# Altium PCB MongooseMini.PcbDoc
Units mil, origin at the board's own origin, x right, y up, seen from the top; angles counter-clockwise.
Board outline 2500 x 1730 mil, 2 copper layers (Top Layer, Bottom Layer); 47 components, 45 nets, 176 pads, 324 vias.
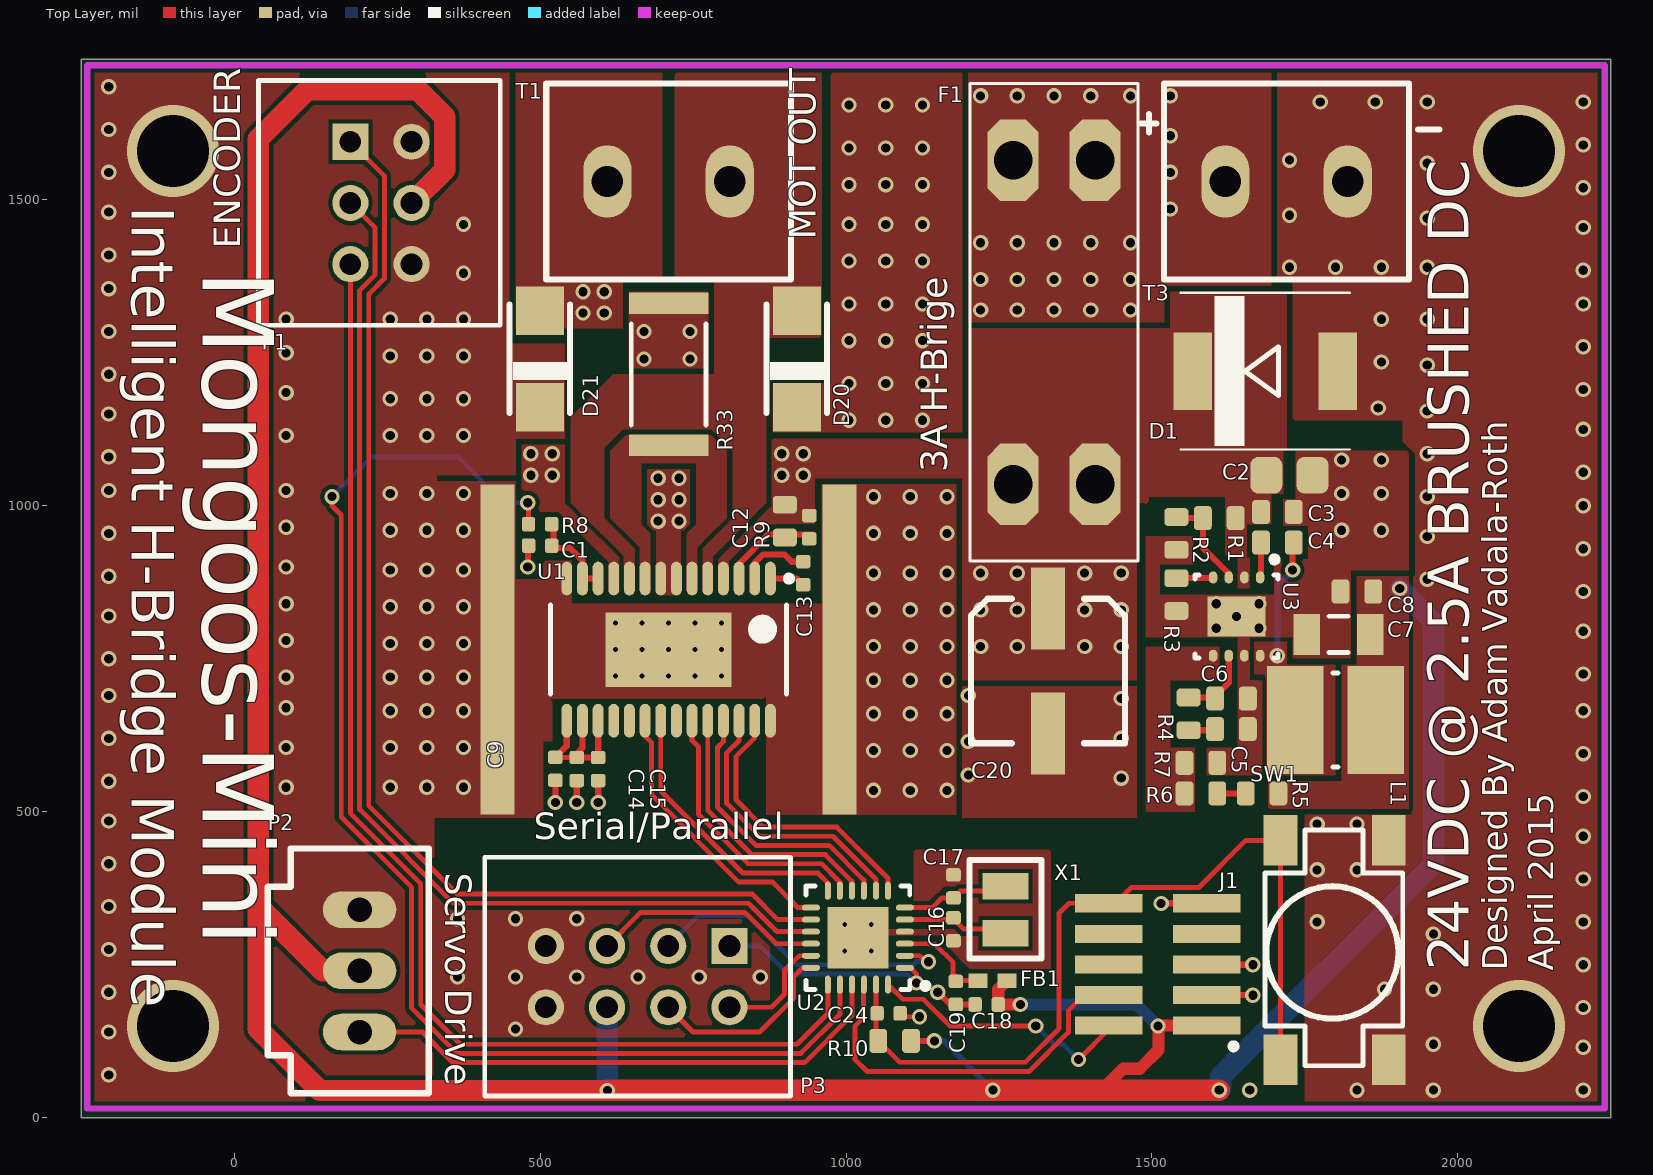
[diagram p0: Top Layer view]
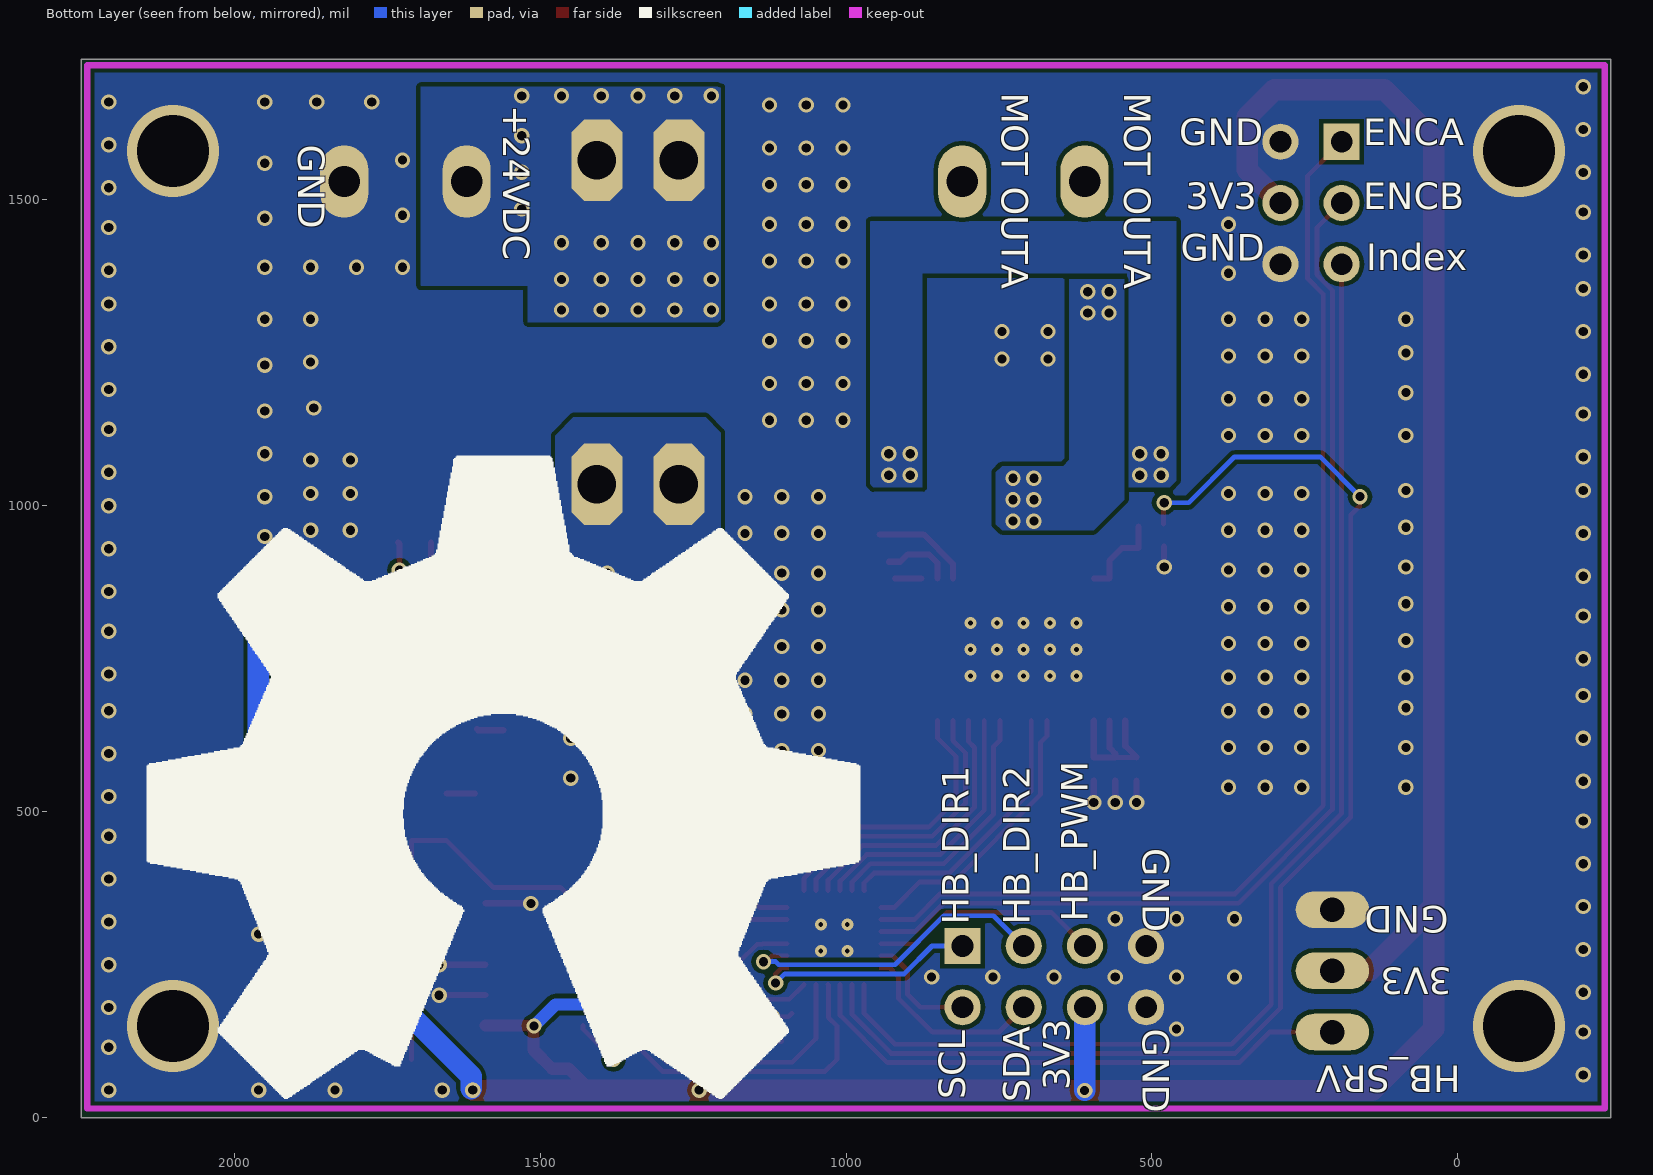
[diagram p1: Bottom Layer view, seen from below]

## Layer stack, top to bottom
Top Solder: solder mask 0.4, Solder Resist, Dk 3.5
Top Layer: signal copper 1.4
Dielectric 1: dielectric 12.6, FR-4, Dk 4.8
Bottom Layer: signal copper 1.4
Bottom Solder: solder mask 0.4, Solder Resist, Dk 3.5

## Board outline
-250,0 -250,1730 2250,1730 2250,0

## Design rules (kind name [scope] priority, off if disabled: settings)
Clearance [All] p1: gap=7
PlaneConnect [All] p1: planeconnectstyle=Direct reliefexpansion=20 reliefentries=4 reliefconductorwidth=10 reliefairgap=10
PolygonConnect [All] p1: connectstyle=Direct reliefconductorwidth=10 reliefentries=4 polygonreliefangle="90 Angle" airgapwidth=10
RoutingVias [All] p1: holewidth=28 width=50 viastyle="Through Hole" minholewidth=28 minwidth=50 maxholewidth=28 maxwidth=50
SolderMaskExpansion [All] p1: expansion=4
UnpouredPolygon [All] p1: allowunpoured=FALSE
Width [All] p1: maxlimit=100 minlimit=7 preferedwidth=8
28 further rules are at their usual default settings.

## Classes and differential pairs
component class Power: C2 C3 C4 C5 C6 C7 C8 C20 D1 F1 L1 R1 R2 R3 R4 R5 R6 R7 T3 U3
component class "MCU - MKL05VQFN24": C16 C17 C18 C19 C24 FB1 J1 P1 P2 P3 R10 SW1 U2 X1
component class "H-Bridge - DRV8829": C1 C9 C12 C13 C14 C15 D20 D21 R8 R9 R33 T1 U1

## Components (designator, comment, footprint, x,y, rotation, side; value= is the part's Value field where it differs from the comment)
C1 "0402" C0402 500,935 r0 top
C2 "0603" C0805 1725,1050 r180 top
C3 "0603" C0603 1705,990 r180 top
C4 "0603" C0603 1705,940 r180 top
C5 "0603" C0603 1630,635 r180 top
C6 "0603" C0603 1630,685 r180 top
C7 "10uF 50V" C1206 1805,790 r180 top
C8 "0603" C0603 1835,860 r0 top
C9 "0402" C0402 525,570 r90 top
C12 "100nF" C0603 900,975 r90 top
C13 "0402" C0402 930,890 r270 top
C14 "100nF" C0402 560,570 r270 top
C15 "100nF" C0402 595,570 r270 top
C16 "0402" C0402 1175.6,308.12 r270 top
C17 "0402" C0402 1175.6,378.12 r270 top
C18 "100nF" C0402 1230,185 r180 top
C19 "100nF" C0402 1179.47,204.16 r270 top
C20 "EEE-1VA101XP" EEE-1VA101XP 1330,730 r90 top
C24 "100nF" C0402 1069.47,170.53 r0 top
D1 "S3A-13-F" DO-214AB 1685,1220 r0 top
D20 "SMAJ30A" SMA-SM 920,1240 r90 top
D21 "SMAJ30A" SMA-SM 500,1240 r90 top
F1 "3557-2" 3557 1340,1300 r270 top
FB1 "BLM15HG601SN1D" BLM18PG121SN1D 1239.47,224.16 r180 top
J1 "FTSH-105-XX-X-DV" FTSH-105-XX-X-DV 1509.47,250.53 r270 top
L1 "LPS4018-224ML" LPS4018-224ML 1800,650 r0 top
P1 "Header 3X2" "HDR2X3 Shrouded - Molex 0901301106" 190,1595 r270 top
P2 "Molex 70543-03" 70543-03 205,240 r270 top
P3 "Header 4X2" "HDR2X4 Shrouded" 809.47,280.53 r180 top
R1 "174K" R0603 1610,980 r0 top
R2 "31.6K" R0603 1540,955 r90 top
R3 "301K" R0603 1540,855 r90 top
R4 "27.4k" R0603 1560,660 r90 top
R5 "51.1r" R0603 1680,530 r0 top
R6 "31.6K" R0603 1580,530 r0 top
R7 "10k" R0603 1580,580 r180 top
R8 "2.7K" R0402 500,970 r0 top
R9 "1M" R0402 940,965 r90 top
R10 "1K" R0603 1079.47,125.53 r0 top
R33 "2512" 2512R-0.55 710,1215 r270 top
SW1 "TL3301AF160QG" TL3301AF160QG 1710,95 r90 top
T1 "Pheonix Contact" CON-PHEONIX-508-Alt 810,1530 r180 top
T3 "Pheonix Contact" CON-PHEONIX-508-Alt 1820,1530 r180 top
U1 "DRV8829" TSSOP28-DRV8829 710,765 r270 top
U2 "MKL05Z16VFK4 - VQFN24" 98ASA00474D 1019.47,294.16 r180 top
U3 "TPS54062DRBT" QFN65P300X300X100_HS-17N 1638.39,818.98 r270 top
X1 "ABS07-32.768KHZ-T" ABS07-32.768KHZ-T 1260.6,378.12 r270 top

## Footprints (in the part's own frame and the unit in brackets; to place one, negate y for a bottom-side part, rotate by r counter-clockwise, add the part's x,y. Pads: shape width x height; smd on the part's side, far side on the other; paste and mask are expansions set on the pad)
98ASA00474D [mm] "QFN, 24-Leads, Body 3.98x3.98mm, Pitch 0.50mm, Thermal Pad 2.80x2.80mm, IPC Medium Density"
  oval 0.75x0.25 smd: 1(-1.95,1.25) 2(-1.95,0.75) 3(-1.95,0.25) 4(-1.95,-0.25) 5(-1.95,-0.75) 6(-1.95,-1.25) 13(1.95,-1.25) 14(1.95,-0.75) 15(1.95,-0.25) 16(1.95,0.25) 17(1.95,0.75) 18(1.95,1.25)
  oval 0.25x0.75 smd: 7(-1.25,-1.95) 8(-0.75,-1.95) 9(-0.25,-1.95) 10(0.25,-1.95) 11(0.75,-1.95) 12(1.25,-1.95) 19(1.25,1.95) 20(0.75,1.95) 21(0.25,1.95) 22(-0.25,1.95) 23(-0.75,1.95) 24(-1.25,1.95)
  rect 2.54x2.54 smd: 25(0,0)
  silkscreen extent -2.93,-2.15 2.15,2.15, body extent -2,-2 2,2, height 1
2512R-0.55 [mm] "2512 Resistor 6.35mm x 3.2mm x 0.55mm"
  rect 0.9x3.3 smd: 1(-2.95,0) 2(2.95,0)
  silkscreen extent -2.1,-1.55 2.1,1.55, body extent -3.22,-1.68 3.22,1.68, height 0.65
3557 [mil] "3557"
  oct 133x83 hole 63: 1(-265,-67) 1(-265,67) 2(265,-67) 2(265,67)
  silkscreen extent -390,-138 390,138, body extent -392,-140 392,140, height 709
70543-03 [mil]
  oval 60x120 hole 40: 1(-100,0) 2(0,0) 3(100,0)
  silkscreen extent -200,-150 200,113, body extent -200,-150 200,113, height 450
ABS07-32.768KHZ-T [mm] "ABS07-32.768KHZ-T Crystal Oscillator"
  rect 1.1x1.9 smd: 1(0,0) 2(1.95,0)
  silkscreen extent -1.1,-1.5 3,1.5
BLM18PG121SN1D [mm] "Chip Inductor, 2-Leads, Body 1.0x0.5mm, IPC Medium Density"
  rect 0.8x0.6 smd: 1(-0.6,0) 2(0.6,0)
  body extent -0.52,-0.28 0.53,0.27, height 0.6
C0402 [mil]
  rrect40% 22x24 smd: 1(-18.7,0) 2(19,0)
  body extent -20,-10 20,10, height 20
C0603 [mm]
  rrect40% 0.74x1 smd: 1(-0.68,0) 2(0.68,0)
  body extent -0.8,-0.4 0.8,0.4, height 0.8
C0805 [mil]
  rrect50% 52x60 smd: 1(-37.4,0) 2(38,0)
  body extent -40,-30 40,30, height 35
C1206 [mm]
  rect 1.1x1.7 smd: 1(-1.325,0) 2(1.325,0)
  silkscreen extent -0.4,-0.75 0.4,0.75, body extent -1.68,-0.87 1.67,0.88, height 1.6
CON-PHEONIX-508-Alt [mm]
  oval 2x3 hole 1.3: 1(0,0) 2(5.08,0)
  silkscreen extent -2.54,-4.06 7.62,4.06
DO-214AB [mil]
  rect 63x126 smd: A(119,0) C(-118.11,0)
  silkscreen extent -138,-128 138,128, body extent -140,-130 140,130, height 98
EEE-1VA101XP [mm] "Panasonic VS D EEE-1VA101XP"
  rect 3.4x1.4 smd: 1(2.6,0) 2(-2.6,0)
  silkscreen extent -3,-3.2 3,3.2, body extent -3.5,-3.3 3.5,3.3, height 5.4
FTSH-105-XX-X-DV [mm] "1.27mm pitch, 10 pin, terminal strip; vertical, SMT"
  rect 0.75x2.8 smd mask+0: 1(2.54,2.03) 2(2.54,-2.03) 3(1.27,2.03) 4(1.27,-2.03) 5(0,2.03) 6(0,-2.03) 7(-1.27,2.03) 8(-1.27,-2.03) 9(-2.54,2.03) 10(-2.54,-2.03)
  silkscreen extent 3.28,3.03 3.52,3.27
"HDR2X3 Shrouded - Molex 0901301106" [mm] "Connector; Header; 3x2 Position Molex 0901301106"
  rect 1.5x1.5 hole 0.9: 1(0,0)
  round 1.5 hole 0.9: 2(0,2.54) 3(2.54,0) 4(2.54,2.54) 5(5.08,0) 6(5.08,2.54)
  silkscreen extent -2.54,-3.81 7.62,6.22, body extent -2.44,-3.65 7.52,6.1, height 8.35
"HDR2X4 Shrouded" [mm] "Connector; Header; 4x2 Position"
  rect 1.5x1.5 hole 0.9: 1(0,0)
  round 1.5 hole 0.9: 2(0,2.54) 3(2.54,0) 4(2.54,2.54) 5(5.08,0) 6(5.08,2.54) 7(7.62,0) 8(7.62,2.54)
  silkscreen extent -2.54,-3.68 10.16,6.22, body extent -2.44,-3.6 10.06,6.15, height 10.06
LPS4018-224ML [mm] "Precision Wire Wound Inductor, 2-Leads, Body 4.40x3.90mm, IPC Medium Density"
  rect 2.35x4.5 smd: 1(-1.675,0) 2(1.675,0)
  silkscreen extent -0.1,-1.95 0.1,1.95, body extent -2.2,-1.95 2.2,1.95, height 1.7
QFN65P300X300X100_HS-17N [mm] "QFN, 16-Leads, Body 3.00x3.00mm, Pitch 0.65mm, Thermal Pad 1.65x2.40mm, IPC Medium Density"
  oval 0.5x0.35 smd: 1(-1.625,0.975) 2(-1.625,0.325) 3(-1.625,-0.325) 4(-1.625,-0.975) 5(1.625,-0.975) 6(1.625,-0.325) 7(1.625,0.325) 8(1.625,0.975)
  rect 1.65x2.4 smd: 9(0,0)
  silkscreen extent -2.5,-1.73 1.73,1.73, body extent -1.58,-1.58 1.58,1.58, height 1
R0402 [mil]
  rrect40% 22x24 smd: 1(-18.9,0) 2(19,0)
  body extent -20,-10 20,10, height 14
R0603 [mm]
  rrect40% 0.74x1 smd: 1(-0.68,0) 2(0.68,0)
  body extent -0.8,-0.4 0.8,0.4, height 0.8
SMA-SM [mil]
  rect 79x79 smd: A(79,0) C(-78.74,0)
  silkscreen extent -89,-49 89,50, body extent -105,-54 105,55, height 116
TL3301AF160QG [mm] "TL3301AF160QG Tactile Switch"
  rect 2.1x1.4 smd: 1(0,0) 1(9.1,0) 2(0,-4.5) 2(9.1,-4.5)
  silkscreen extent -0.25,-5.08 9.53,0.64, body extent -0.43,-5.26 9.57,0.74, height 5.11
TSSOP28-DRV8829 [mm] "TSOP, 28-Leads, Body 9.70x4.40mm, Pitch 0.65mm, Thermal Pad 5.22x3.10mm, IPC Medium Density"
  oval 1.4x0.45 smd: 1(-2.95,4.225) 2(-2.95,3.575) 3(-2.95,2.925) 4(-2.95,2.275) 5(-2.95,1.625) 6(-2.95,0.975) 7(-2.95,0.325) 8(-2.95,-0.325) 9(-2.95,-0.975) 10(-2.95,-1.625) 11(-2.95,-2.275) 12(-2.95,-2.925) 13(-2.95,-3.575) 14(-2.95,-4.225) 15(2.95,-4.225) 16(2.95,-3.575) 17(2.95,-2.925) 18(2.95,-2.275) 19(2.95,-1.625) 20(2.95,-0.975) 21(2.95,-0.325) 22(2.95,0.325) 23(2.95,0.975) 24(2.95,1.625) 25(2.95,2.275) 26(2.95,2.925) 27(2.95,3.575) 28(2.95,4.225)
  rect 3.1x5.22 smd: 29(0,0)
  silkscreen extent -3.07,-4.9 1.85,5.13, body extent -2.25,-4.9 2.25,4.9, height 1.2

## Part data
C1: library part "100nF C0402 - GRM155R71C104KA88D", "Capacitor (Semiconductor SIM Model)"
C2: library part CL21A225KB9LNNC, "CAP CER 2.2UF 50V 10% X5R 0805"
C3 C8: library part CL10B104KB8SFNC, "CAP CER 0.1UF 50V 10% X7R 0603"
C4: library part CL10B103KB8NCNC, "CAP CER 10000PF 50V 10% X7R 0603"
C5: library part CL10B223JB8NNNC, "CAP CER 0.022UF 50V 5% X7R 0603"
C6: library part CL10C270JB8NNNC, "CAP CER 27PF 50V 5% NP0 0603"
C7: library part CL31A106KBHNNNE, "CAP CER 10UF 50V 10% X5R 1206"
C9: library part GRM155R60J474KE19D, "0.47uF 6.3v C0402 - GRM155R60J474KE19D"
C12: library part C0603C104K5RACTU, "CAP CER 0603 100nF 50V 10% X7R"
C13: library part GRM155R71H103JA88D, "CAP CER 10000PF 50V X7R 0402"
C14 C15 C18 C19 C24: library part GRM155R71C104KA88D, "CAP CER 0402 100nF 16V 10% X7R"
C16 C17: library part CL05C180GB5NNNC, "CAP CER 18PF 50V 2% NP0 0402"
C20: "CAP ALUM 100UF 35V 20% SMD"
D1: "DIODE DO-214AB"
D20 D21: "DIODE TVS 30V SMA"
F1: "FUSE PTH ATO"
J1: library part "ARM Cortex JTAG-DEBUG Header"
L1: "Inductor"
P1: "Header, 3-Pin, Dual row"
P2: library part "Molex Endstop"
P3: "Header, 4-Pin, Dual row"
R1: library part RC1608F1743CS, "RES SMD 174K OHM 1% 1/10W 0603"
R2 R6: library part RC1608F3162CS, "RES SMD 31.6K OHM 1% 1/10W 0603"
R3: library part RC1608F3013CS, "RES SMD 301K OHM 1% 1/10W 0603"
R4: library part RC1608F2742CS, "RES SMD 27.4K OHM 1% 1/10W 0603"
R5: library part RC1608F51R1CS, "RES SMD 51.1 OHM 1% 1/10W 0603"
R7: library part RC1608J103CS, "RES SMD 10K OHM 5% 1/10W 0603"
R8: library part ERJ-2RKF2701X, "RES SMD 2.7K OHM 1% 1/10W 0402"
R9: library part ERJ2GEJ105X, "RES 0402 1M 100mW 5%"
R10: library part ERJ-3EKF1001V, "RES 0603 1K 100mW 1%"
R33: library part CSRN2512FTR100, "RES SMD 0.1 OHM 1% 2W 2512"
T1 T3: library part "Pheonix Contact 2X1"
U1: "IC MOTOR DRIVER PAR 28HTSSOP"
U2: library part "MKL05Z16VFK4 - 24 Pin VQFN", "ARM Cortex M0+"
U3: "IC REG BUCK SYNC ADJ 50MA DRBT"
X1: "ABS07-32.768KHZ-T RTC Crystal Oscillator"

## Free pads (board coordinates)
  rect 55.12x539.37 smd: 1(430.47,765) 1(989.53,765)

## Via types
v1: diameter 25, hole 15, Top Layer to Bottom Layer, 301 vias
v2: diameter 19.68, hole 7.87, Top Layer to Bottom Layer, 19 vias
v3: diameter 150, hole 118.11, Top Layer to Bottom Layer, 4 vias

## Nets (pads, with @x,y where several pads share a name; then routed paths per layer and width w, separated by ;. In a path a pad name is that pad's centre, name@x,y a point inside that pad or via, vN(x,y) a via of type N, cw(c..) or ccw(c..) an arc to the next point about the centre after c; other vN are vias at no path point)
3.3VCC: C7.1 C8.2 C18.1 FB1.1 J1.1 L1.2 P1.4 P2.2 P3.6 R5.2 R10.2 | length 5645.3
  Top Layer w10: R10.2@1106.25,125.53 v1(1144.47,125.53)
  Top Layer w20: FB1.1 1248.7,209.77 C18.1 v1(1285,185) ; 1416.47,43.53 1452.95,80 1480,80 1510.53,110.53 1510.53,150.53 J1.1
  Top Layer w35: 40,345.5 39.5,345 39.5,145 140,44.5 v1(610,44.5) 610.5,45 v1(1240,45) v1(1610,45) ; P2.2 145,240 39.5,345.5 39.5,1599.5 120,1680 300,1680 344.03,1635.97 344.03,1549.03 P1.4
  Bottom Layer w10: v1(1144.47,125.53) 1159.47,125.53 v1(1240,45)
  Bottom Layer w20: v1(1285,185) 1475,185 v1(1510,150)
  Bottom Layer w35: P3.6 609.47,45.03 v1(610,44.5) ; v1@1612.5,47.5 1612.5,67.5 1960.5,415.5 1960.5,809.5 v1(1905,865)
24VCC: C2.2 C3.2 C12.2 C20.1 D1.C F1.2 R1.2 R9.2 U1.4 U1.11 U3.2
  other v1: 1220,770 1280,770 1390,770 1450,770 1220,830 1280,830 1390,830 1450,830 1220,890 1280,890 1390,890 1450,890 485,1050 520,1050 895,1050 930,1050 485,1085 520,1085 895,1085 930,1085
ENC_A: P1.1 U2.14 | length 1918.4
  Top Layer w8: P1.1 245.53,1539.47 245.53,1371.47 220,1345.95 220,510 364.47,365.53 846.9,365.53 888.74,323.69 U2.14
ENC_B: P1.3 U2.15 | length 1839
  Top Layer w8: P1.3 230.53,1454.47 230.53,1377.69 205,1352.16 205,503.79 358.26,350.53 840.69,350.53 887.21,304 U2.15
ENC_INDEX: P1.5 U2.19 | length 2017.8
  Top Layer w8: P1.5 190,497.57 305,382.57 305,185 370,120 920,120 970.26,170.26 U2.19
GND: C1.1 C2.1 C3.1 C5.1 C6.1 C7.2 C8.1 C9.1 C14.2 C15.2 C16.2 C17.1 C18.2 C19.2 C20.2 C24.2 D1.A D20.C D21.C J1.3 J1.5 J1.9 P1.2 P1.6 P2.1 P3.7 P3.8 pad.1 R2.1 R3.1 R7.1 R33.1 SW1.2 T3.1 U1.14 U1.28 U1.29 U2.4 U2.25 U3.7 U3.9 | length 471.1
  Top Layer w8: C24.2 1094,165 v1(1120,165)
  Top Layer w10: v1(480,900) C1.1@480,933.7 ; v1(525,515) C9.1@525,551 ; v1(560,515) C14.2 ; v1(595,515) C15.2 ; v1(1150,205) 1170,185 C18.2 ; v1(1515,350) 1515.53,350.53 J1.9 ; J1.3 1664.47,200.53 v1(1665,200) ; J1.5 1589.92,250 v1(1665,250)
  other v1: 1660,45 1835,45 1960,45 2205,45 -205,70 2205,115 1960,120 -205,140 460,145 2205,180 -205,205 1880,210 1960,210 365,230 460,230 560,230 660,230 760,230 860,230 2205,250 -205,275 1960,300 1770,320 2205,320 365,325 460,325 560,325 -205,345 2205,390 1770,405 1835,405 -205,415 2205,460 1770,480 1835,480 -205,485 2205,525 1045,535 1105,535 1165,535 85,540 255,540 315,540 375,540 -205,550 1450,555 1200,560 2205,595 1045,600 1105,600 1165,600 85,605 255,605 315,605 375,605 1200,615 -205,620 1450,620 1045,660 1105,660 1165,660 255,665 315,665 375,665 2205,665 85,670 1450,685 -205,690 1200,690 1045,715 1105,715 1165,715 85,720 255,720 315,720 375,720 2205,725 -205,750 1045,770 1105,770 1165,770 255,775 315,775 375,775 85,780 2205,795 1605,800 1675,800 1638.39,818.98 -205,820 1045,830 1105,830 1165,830 255,835 315,835 375,835 85,840 1605,840 1675,840 2205,860 1950,880 -205,885 1045,890 1105,890 1165,890 255,895 315,895 375,895 85,900 2205,930 1950,950 -205,955 1045,955 1105,955 1165,955 255,960 315,960 375,960 1810,960 1875,960 85,965 2205,1000 1045,1015 1105,1015 1165,1015 1950,1015 255,1020 315,1020 375,1020 1810,1020 1875,1020 -205,1025 85,1025 85,1025 2205,1055 1810,1075 1875,1075 -205,1080 1950,1085 85,1115 255,1115 315,1115 375,1115 2205,1125 1005,1140 1065,1140 1125,1140 -205,1150 1950,1155 1870,1160 255,1175 315,1175 375,1175 85,1185 2205,1190 1005,1200 1065,1200 1125,1200 -205,1215 1950,1230 1875,1235 670,1240 745,1240 255,1245 315,1245 375,1245 85,1250 2205,1260 1005,1270 1065,1270 1125,1270 -205,1285 670,1285 745,1285 85,1305 255,1305 315,1305 375,1305 1875,1305 1950,1305 1005,1330 1065,1330 1125,1330 2205,1330 -205,1355 375,1380 2205,1385 1725,1390 1800,1390 1875,1390 1950,1390 1005,1400 1065,1400 1125,1400 -205,1410 2205,1455 375,1460 1005,1460 1065,1460 1125,1460 1950,1470 1725,1475 -205,1480 2205,1520 1005,1525 1065,1525 1125,1525 -205,1545 1950,1560 1725,1565 1005,1585 1065,1585 1125,1585 2205,1590 -205,1615 1005,1655 1065,1655 1125,1655 1775,1660 1865,1660 1950,1660 2205,1660 -205,1685
  other v2: 997.82,272.51 1041.13,272.51 997.82,315.81 1041.13,315.81 623.39,721.69 666.69,721.69 710,721.69 753.31,721.69 796.61,721.69 623.39,765 666.69,765 710,765 753.31,765 796.61,765 623.39,808.31 666.69,808.31 710,808.31 753.31,808.31 796.61,808.31
  other v3: -100,150 2100,150 -100,1580 2100,1580
HB_DIR1: P3.1 U2.1 | length 368.5
  Top Layer w8: U2.1 1105.05,244.95 1115,235 v1(1115,220)
  Bottom Layer w8: P3.1 859.47,280.53 905,235 1100,235 v1(1115,220)
HB_DIR2: P3.3 U2.2 | length 524
  Top Layer w8: U2.2 1120.37,264.63 1130,255 v1(1135,255)
  Bottom Layer w8: P3.3 758.94,330 840,330 920,250 1110,250 1115,255 v1(1135,255)
HB_PWM: P3.5 U2.16 | length 377.2
  Top Layer w8: P3.5 664.47,335.53 834.47,335.53 885.68,284.32 U2.16
HB_SRV: P2.3 U2.21 | length 911.4
  Top Layer w8: P2.3@205,130.53 214.47,140 307.57,140 357.57,90 932.43,90 1009.63,167.2 U2.21
I2C_SCL: P3.2 U2.17 | length 190.8
  Top Layer w8: P3.2 878.26,180.53 899.47,201.74 899.47,240.53 923.58,264.63 U2.17
I2C_SDA: P3.4 U2.18 | length 314
  Top Layer w8: P3.4 750,140 858.95,140 914.47,195.53 914.47,230.53 928.89,244.95 U2.18
NetC1_2: C1.2 R8.2 U1.12 U1.13 | length 145.8
  Top Layer w10: R8.2@522,966 522,931 549,931 569.25,910.75 U1.13 U1.12
NetC4_1: C4.1 L1.1 U3.8 | length 196.1
  Top Layer w10: v1(1730,895) 1730,938.23 C4.1
  Bottom Layer w10: v1(1705,755) 1705,870 v1(1730,895)
NetC4_2: C4.2 U3.1 | length 57.7
  Top Layer w10: U3.1 1678.23,884.41 C4.2
NetC5_2: C5.2 R4.1 | length 44
  Top Layer w10: R4.1 1601.46,633.23 C5.2
NetC6_2: C6.2 R4.2 U3.6 | length 119.7
  Top Layer w10: R4.2 1601.45,686.78 1625.59,710.91 U3.6
NetC9_2: C9.2 C14.1 C15.1 U1.15 U1.16 U1.17 | length 261.9
  Top Layer w8: C9.2 559.7,589 C14.1
  Top Layer w10: C9.2 543.66,607.66 U1.15 ; U1.16 569.25,604.25 560,595 C14.1 C15.1 595,648.7 U1.17
NetC12_1: C12.1 R9.1 U1.3 | length 163.8
  Top Layer w10: U1.3 825.16,905.16 873.23,953.23 R9.1@945,953.23
NetC13_1: C13.1 U1.2 | length 115.6
  Top Layer w10: U1.2 850.75,906.71 864.74,920.7 899.3,920.7 911.3,908.7 C13.1
NetC13_2: C13.2 U1.1 | length 43.5
  Top Layer w10: U1.1 C13.2@919.86,881.14
NetC16_1: C16.1 U2.5 X1.2 | length 144.2
  Top Layer w8: U2.5 1172.47,323.69 C16.1 ; C16.1@1178.05,322.65 1192.58,308.12 X1.2@1235.6,308.12
NetC17_2: C17.2 U2.6 X1.1 | length 178.7
  Top Layer w8: U2.6 1140.85,343.37 1156.6,359.12 C17.2 1186.81,370.33 X1.1@1252.81,370.33 ; X1.1@1236.69,371.38 X1.1@1244.47,379.16
NetC19_1: C19.1 FB1.2 U2.3 | length 155.5
  Top Layer w8: U2.3 1135.68,284.32 1136.5,283.5 1145.24,283.5 1175,253.74 1175,235 1185.84,224.16 FB1.2
NetD20_A: D20.A T1.1 U1.5 U1.10
NetD21_A: D21.A T1.2 U1.7 U1.8
  other v1: 693,975 727,975 693,1010 727,1010 693,1045 727,1045 570,1315 605,1315 570,1350 605,1350
NetF1_1: F1.1 T3.2
  other v1: 1220,1320 1280,1320 1340,1320 1400,1320 1465,1320 1220,1370 1280,1370 1340,1370 1400,1370 1465,1370 1220,1430 1280,1430 1340,1430 1400,1430 1465,1430 1530,1485 1530,1545 1530,1605 1220,1670 1280,1670 1340,1670 1400,1670 1465,1670 1530,1670
NetR1_1: R1.1 R2.2 U3.3 | length 158.6
  Top Layer w10: R2.2 1541.77,980 R1.1 1583.23,931.77 1625.59,889.41 U3.3
NetR3_2: R3.2 U3.4 | length 60.5
  Top Layer w10: R3.2 1598.82,881.78 U3.4
NetR5_1: R5.1 R6.2 | length 46.5
  Top Layer w10: R6.2 R5.1
NetR6_1: R6.1 R7.2 U3.5
NetR8_1: R8.1 U2.20 | length 2109.1
  Top Layer w8: v1(160,1015) 160,1000 175,985 175,491.36 290,376.36 290,178.79 363.79,105 926.21,105 989.95,168.73 U2.20 ; v1(480,1005) 481.1,1003.9 R8.1
  Bottom Layer w8: v1(160,1015) 225,1080 365,1080 440,1005 v1(480,1005)
NetR33_2: R33.2 U1.6 U1.9
NetU1_20: U1.20 U2.13 | length 462.3
  Top Layer w8: U1.20 671.61,623.39 682.21,612.8 682.21,527.8 825,385 880,385 921.63,343.37 U2.13
NetU1_21: U1.21 U2.12 | length 464
  Top Layer w8: U1.21 697.21,534.01 831.21,400 953.93,400 970.26,383.67 U2.12 U2.12@969.47,371.72
NetU1_23: U1.23 U2.11 | length 448.3
  Top Layer w8: U1.23 748.39,616.61 758.98,606.02 758.98,496.17 840.15,415 960.15,415 989.95,385.2 U2.11
NetU1_24: U1.24 U2.10 | length 445.8
  Top Layer w8: U1.24 773.98,502.38 846.36,430 966.36,430 1009.63,386.73 U2.10
NetU1_25: U1.25 U2.9 | length 451.3
  Top Layer w8: U1.25 799.57,614.57 790,605 790,507.57 852.57,445 972.57,445 1029.32,388.26 U2.9
NetU1_26: U1.26 U2.8 | length 457.6
  Top Layer w8: U1.26 825.16,616.37 805,596.21 805,513.79 858.79,460 978.79,460 1049,389.79 U2.8
NetU1_27: U1.27 U2.7 | length 464
  Top Layer w8: U1.27 850.75,620.75 820,590 820,520 865,475 985,475 1068.69,391.32 U2.7
RESET: C24.1 J1.10 R10.1 SW1.1 U2.23 | length 1374.1
  Top Layer w8: U2.23 1049,129.24 R10.1 1087.71,90.53 1293.26,90.53 1348.43,145.7 1348.43,334.49 1364.47,350.53 J1.10 ; J1.10@1440,350 1466.29,376.29 1576.3,376.29 1653.28,453.27 1710,453.27 SW1.1@1710,95
TCK/SWDCLK: J1.4 U2.22 | length 623.2
  Top Layer w8: U2.22 1028.77,216.85 1028.77,163.77 1015,150 1015,95 1034.47,75.53 1299.47,75.53 1363.43,139.49 1363.43,174.49 1389.47,200.53 J1.4
TDI: J1.8
TDO/SWO: J1.6
TMS/SWDIO: J1.2 U2.24 | length 438.1
  Top Layer w8: U2.24 1092.55,193.53 1126.47,193.53 1170,150 v1(1310,150) ; v1(1380,95) 1429.55,144.55 J1.2
  Bottom Layer w8: v1(1310,150) 1340,120 1355,120 v1(1380,95)
pads on no net: J1.7 U1.18 U1.19 U1.22

## Polygon pours and split planes (outlines as drawn)
GND on Top Layer "Bottom Layer-No Net" (solid, remove dead copper, pour order 67): 335,1720 -240,1720 -240,15 180,15 325,15
GND on Top Layer "Bottom Layer-No Net" (solid, remove dead copper, pour order 65): 1190,705 1475,705 1475,490 1190,490
GND on Top Layer "Bottom Layer-No Net" (solid, remove dead copper, pour order 63): 1750,495 1750,0 2240,0 2240,1720 1910,1720 1910,1530 1910,1105 1930,1085 1930,885 1925,885 1925,495
GND on Top Layer "Bottom Layer-No Net" (solid, remove dead copper, pour order 61): 0,1075 190,1075 190,497.57 205,482.57 315,372.57 315,44.5 95.5,44.5 95,45 90,50 90,105 60,105 55,100 55,280 55,935 0,990
GND on Top Layer "Bottom Layer-No Net" (solid, remove dead copper, pour order 59): 460,1050 460,1110 540,1110 540,1265 450,1265 450,1720 15,1720 15,1050
GND on Top Layer "Bottom Layer-No Net" (solid, remove dead copper, pour order 57): 305,382.57 305,185 370,120 875,120 875,295.53 805,365.53 787.95,382.57 305,382.57
GND on Top Layer "Bottom Layer-No Net" (solid, remove dead copper, pour order 51): 880,1200 880,1120 1187.93,1120 1190,1120 1190,1125 1190,1720 989.5,1720 975,1720 975,1685 975,1200
GND on Top Layer "Bottom Layer-No Net" (solid, remove dead copper, pour order 47): 1110.6,438.12 1110.6,353.12 1140.6,353.12 1140.6,358.12 1160.6,378.12 1200.6,378.12 1200.6,308.12 1155.6,308.12 1055,308.12 1055,298.12 1165,298.12 1165,280 1201.88,243.12 1335,243.12 1335,438.12
GND on Top Layer "Bottom Layer-No Net" (solid, remove dead copper, pour order 45): 1730,1140 1920,1140 1920,1390 1920,1720 1705,1720 1705,1370 1730,1370
NetF1_1 on Top Layer "Bottom Layer-No Net" (solid, remove dead copper, pour order 41): 1695,1370 1695,1720 1200,1720 1200,1300 1520,1300 1520,1360 1695,1360
24VCC on Top Layer "Bottom Layer-No Net" (solid, remove dead copper, pour order 39): 945,1110 1200,1110 1200,1290 1530,1290 1530,1350 1720,1350 1720,1090 1495,1090 1495,1007.5 1490,1002.5 1487.5,1005 1475,1005 1475,715 1190,715 1190,1045 1160,1045 945,1045
NetD21_A on Top Layer "Bottom Layer-No Net" (solid, remove dead copper, pour order 32): 700,1720 460,1720 460,1290 635,1290 635,1370 700,1370
24VCC on Top Layer "Bottom Layer-No Net" (solid, remove dead copper, pour order 30): 629,860 629,916 620,925 540,1005 540,1035 540,1100 470,1100 470,990 530,990 612,908 612,860 617,855 624,855
GND on Top Layer "Bottom Layer-No Net" (solid, remove dead copper, pour order 28): 460,910 460,880 505,880 505,910 552,910 552,840 655,840 960,840 960,1035 1180,1035 1180,495 1065,495 870,495 870,645 870,690 865,685 515,685 520,680 520,615 505,615 505,490 230,490 230,1040 460,1040
24VCC on Top Layer "Bottom Layer-No Net" (solid, remove dead copper, pour order 26): 791,862 791,912.46 798.54,920 878.54,1000 878.54,1110 948.54,1110 948.54,970 868.54,970 808,909.46 808,862 801,855 798,855
GND on Top Layer "Bottom Layer-No Net" (solid, remove dead copper, pour order 22): 645,1350 645,1225 775,1225 775,1350
NetD20_A on Top Layer "Bottom Layer-No Net" (solid, remove dead copper, pour order 18): 655,864 655,930 650,935 605,980 605,985 605,1095 630,1120 635,1125 655,1125 710,1125 780,1125 815,1090 815,980 766,931 766,861 772,855 776,855 782,861 782,917 795,930 870,1005 870,1275 960,1275 960,1720 720,1720 720,1370 785,1370 785,1215 635,1215 620,1215 550,1145 550,1005 575,980 630,925 637,918 637,864 646,855
NetR33_2 on Top Layer "Bottom Layer-No Net" (solid, remove dead copper, pour order 16): 645,1115 640,1115 615,1090 615,980 650,945 663,932 663,861 669,855 675,855 680,860 680,910 680,955 665,970 665,1070 755,1070 755,970 740,955 740,860 745,855 750,855 752,855 757,860 757,862 757,932 775,950 805,980 805,995 805,1090 780,1115 765,1115
NetD21_A on Top Layer "Bottom Layer-No Net" (solid, remove dead copper, pour order 13): 695,854 725,854 730,859 730,960 745,960 745,1060 675,1060 675,960 690,960 690,859
24VCC on Top Layer "Bottom Layer-No Net" (solid, remove dead copper, pour order 11): 1660,865 1640,865 1640,920 1620,920 1620,1015 1490,1015 1490,1090 1715,1090 1715,1020 1695,1020 1695,970 1660,970 1655,970 1655,915 1660,915
3.3VCC on Top Layer "Bottom Layer-No Net" (solid, remove dead copper, pour order 9): 1920,885 1835,885 1835,740 1815,740 1810,740 1810,675 1810,550 1690,550 1690,500 1695,505 1920,505
NetC4_1 on Top Layer "Bottom Layer-No Net" (solid, remove dead copper, pour order 7): 1720,780 1720,740 1800,740 1800,560 1685,560 1685,685 1685,725 1665,725 1665,780
GND on Top Layer "Bottom Layer-No Net" (solid, remove dead copper, pour order 5): 1590,560 1675,560 1680,565 1680,715 1660,715 1660,770 1660,800 1640,800 1640,610 1640,605 1590,605
NetR6_1 on Top Layer "Bottom Layer-No Net" (solid, remove dead copper, pour order 3): 1610,770 1490,770 1490,500 1570,500 1570,605 1530,605 1530,715 1605,715 1610,715
GND on Top Layer "Bottom Layer-No Net" (solid, remove dead copper): 1920,1090 1920,895 1825,895 1825,750 1824.37,750.63 1730,750.63 1730,785 1660,785 1490,785 1490,950 1567.56,950 1567.56,904.81 1512.44,904.81 1512.44,855 1575,855 1700,855 1700,885 1700,902.64 1709.8,912.44 1755.2,912.44 1755.2,967.56 1715,967.56 1715,1011 1735,1011 1735,1080 1735,1090 1745,1090
NetF1_1 on Bottom Layer "Bottom Layer-No Net" (solid, remove dead copper, pour order 55): 1205,1685 1205,1300 1520,1300 1520,1360 1695,1360 1695,1685
24VCC on Bottom Layer "Bottom Layer-No Net" (solid, remove dead copper, pour order 53): 1230,1145 1445,1145 1475,1115 1475,750 1450,725 1230,725 1205,750 1205,1120
GND on Bottom Layer "Bottom Layer-No Net" (solid, remove dead copper, pour order 49): -240,1715 2240,1715 2240,15 -240,15
24VCC on Bottom Layer "Bottom Layer-No Net" (solid, remove dead copper, pour order 37): 540,1030 540,1380 875,1380 875,1030 955,1030 960,1035 960,1465 460,1465 460,1030
NetD21_A on Bottom Layer "Bottom Layer-No Net" (solid, remove dead copper, pour order 20): 545,1370 635,1370 635,1225 635,1075 645,1065 745,1065 755,1055 755,970 745,960 655,960 595,960 545,1010

## Keep-outs
Keep-Out Layer:
  lines w10: -240,15 2240,15 2240,1720 -240,1720 -240,15

## Silkscreen, mask and mechanical layers (free items; w line width, h text height)
Top Overlay:
  lines w10: 1482.5,1625 1507.5,1625 ; 1495,1610 1495,1640 ; 1935,1615 1970,1615
  text "Intelligent H-Bridge Module" at -190,1490 h120 r270
  text "MOT OUT" at 965,1435 h75 r90
  text "ENCODER" at 25,1420 h75 r90
  text "Mongoos-Mini" at -90,1385 h200 r270
  text "3A H-Brige" at 1180,1055 h75 r90
  text "Serial/Parallel" at 490,440 h75
  text "Servo Drive" at 330,400 h75 r270
  text "24VDC @ 2.5A BRUSHED DC" at 2040,240 h115 r90
  text "Designed By Adam Vadala-Roth" at 2095,240 h70 r90
  text "April 2015" at 2170,240 h70 r90
Bottom Overlay:
  region: 3068 vertices and 0 holes, not listed, extent 977.1,30.55 2142.92,1081.97
  text "MOT OUTA" at 560,1675 h75 r90
  text "MOT OUTA" at 760,1675 h75 r90
  text "+24VDC" at 1575,1655 h75 r90
  text "GND" at 1910,1590 h75 r90
  text "ENCA" at 155,1575 h75
  text "GND" at 455,1575 h75
  text "ENCB" at 155,1470 h75
  text "3V3" at 445,1470 h75
  text "GND" at 452.86,1385.46 h75
  text "Index" at 150,1370 h75
  text "GND" at 530,440 h75 r90
  text "GND" at 15,360 h75 r180
  text "HB_PWM" at 590,320 h75 r270
  text "HB_DIR2" at 685,315 h75 r270
  text "HB_DIR1" at 785,315 h75 r270
  text "3V3" at 10,260 h75 r180
  text "GND" at 530,145 h75 r90
  text "HB_SRV" at -5,100 h75 r180
  text "3V3" at 620,45 h75 r270
  text "SCL" at 790,30 h75 r270
  text "SDA" at 685,25 h75 r270
Mechanical 15:
  the board outline again, w10

## Text inside footprints (layer, text, board x,y; h text height)
P2: Mechanical 8 "1" at 142.5,402.5 h62 r270